# Altium PCB STM32WL.PcbDoc (part 2 of 2)
Units mm, origin at the board's own origin, x right, y up, seen from the top; angles counter-clockwise.
Board outline 40.25 x 54.25 mm, 4 copper layers (Top Layer, Int1 (GND), Int2 (PWR), Bottom Layer), stack 1.57 mm thick; 116 components, 68 nets, 370 pads, 250 vias.
Unrouted connection lines stored in the file: 2.
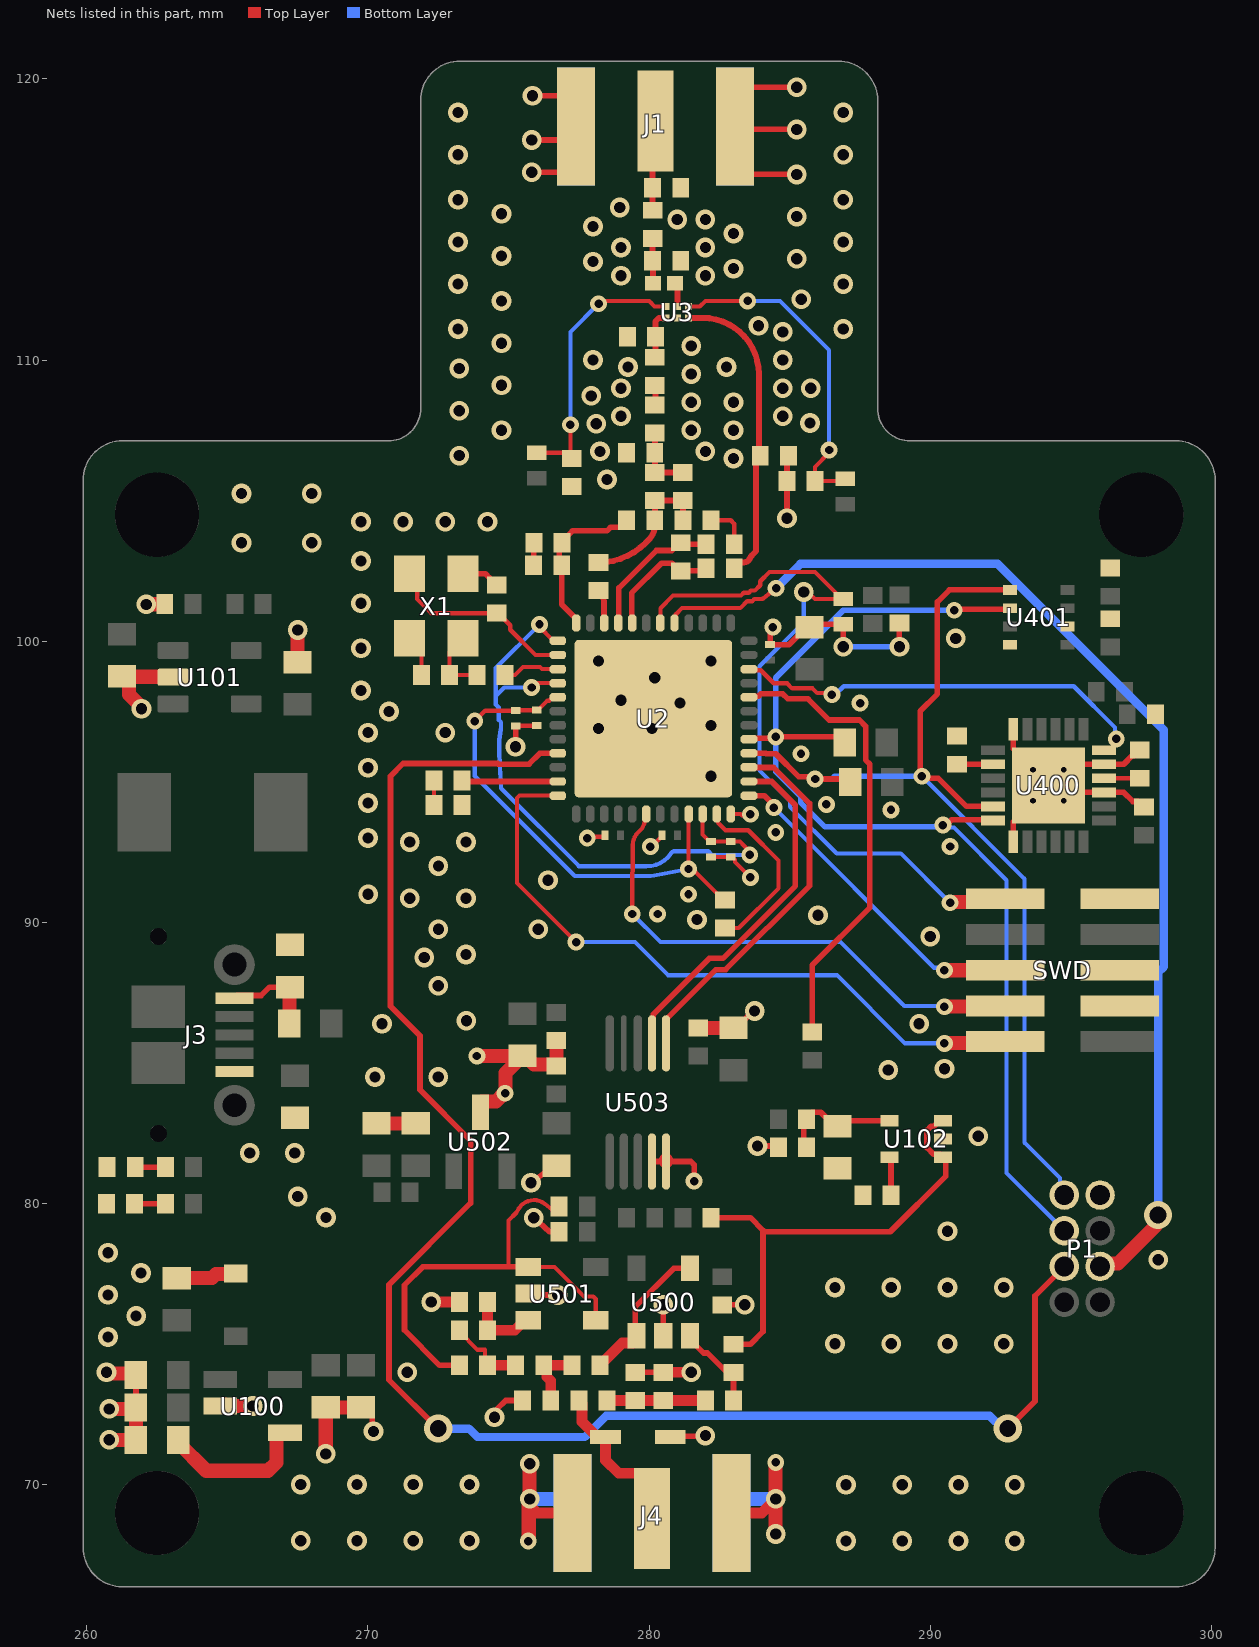
[diagram p4: the nets of this part, all layers, seen from the top]

## Via types
v1: diameter 0.7, hole 0.4, Top Layer to Bottom Layer, 184 vias
v2: diameter 0.6, hole 0.3, Top Layer to Bottom Layer, 50 vias
v3: diameter 1, hole 0.6, Top Layer to Bottom Layer, 12 vias
v4: diameter 0.5, hole 0.2, Top Layer to Bottom Layer, 4 vias

## Nets (pads, with @x,y where several pads share a name; then routed paths per layer and width w, separated by ;. In a path a pad name is that pad's centre, name@x,y a point inside that pad or via, vN(x,y) a via of type N, cw(c..) or ccw(c..) an arc to the next point about the centre after c; other vN are vias at no path point) (continued)
GND: C1.1 C2.1 C5.1 C7.1 C8.1 C10.1 C11.1 C12.1 C13.1 C14.1 C17.1 C18.1 C19.2 C20.2 C21.1 C22.1 C24.1 C25.1 C26.1 C27.1 C29.1 C31.1 C100.1 C101.1 C102.1 C103.1 C104.1 C105.1 C106.1 C107.1 C108.1 C109.1 C110.2 C200.1 C205.1 C400.1 C401.1 C402.1 C403.1 C404.1 C405.1 C500.1 C503.1 C504.1 C508.1 C509.1 C510.1 C511.1 C512.1 C513.1 C514.1 C515.1 D500.1 J1.2 J3.5 J4.2 P1.2 R101.1 R103.1 R104.1 R114.1 R200.1 R204.1 R501.1 SWD.3 SWD.5 SWD.9 U2.48 U2.49 U3.2 U100.2 U101.2 U102.2 U400.1 U400.9 U400.11 U400.18 U400.25 U401.1 U401.7 U500.2 U501.2 U502.3 U503.4 U503.5 X1.2 X1.4 | length 98.3
  Top Layer w0.15: X1.2@271.479,100.098 271.904,99.673 C11.1@271.904,98.798 ; C27.1@275.258,96.981 275.27,96.994 275.987,96.994 C26.1@276,97.006 ; v2(277.8,93) 277.85,93.05 278.375,93.05 C14.1@278.425,93.1 C14.1@278.4,93.125 ; v2(280.044,92.695) 280.095,92.695 280.45,93.05 C21.1@280.45,93.1 ; C25.1@282.2,92.325 C24.1@282.9,92.325 282.95,92.325 283.05,92.225 283.05,92.15 v2(283.6,91.6) ; C5.1@282.2,104.3 282.9,104.3 283.025,104.175 C18.1@283.025,103.45 ; U2.48@282.902,93.851 283.249,93.851 283.3,93.8
  Top Layer w0.2: C103.1@261.7,72.7 C103.1@261.75,72.75 C102.1@261.75,73.9 ; U100.2@264.75,72.8 U100.2@264.95,73 ; C105.1@269.75,72.75 269.85,72.75 270.15,72.45 270.15,71.95 v1(270.2,71.9) ; X1.4@273.379,102.398 274.179,102.398 274.329,102.248 274.329,102.198 274.529,101.998 C10.1@274.579,101.998 ; v1(274.5,72.4) 274.596,72.496 274.596,72.696 274.9,73 C503.1@275.5,73 ; v1(275.245,96.25) 275.251,96.256 275.251,96.975 C27.1@275.258,96.981 ; U501.2@275.7,76.8 275.75,76.75 v1(276.75,76.75) ; v1(275.8,80.746) 276.6,81.35 C510.1@276.7,81.35 ; v1(275.825,116.675) 276.825,116.675 277.4,117.25 J1.2@277.4,118.3 ; v1(275.825,117.825) 276.925,117.825 J1.2@277.4,118.3 ; v1(275.85,119.4) 276.825,119.4 277.4,118.825 J1.2@277.4,118.3 ; C2.1@275.891,102.7 275.9,102.709 C1.1@275.9,103.5 ; v1(275.9,79.5) 276.461,79 C20.2@276.8,79 ; R501.1@279.5,74 C500.1@280.5,74 ; U503.4@280.1,81.5 U503.5@280.554,81.5 ; U500.2@280.5,75.3 v1(280.5,76.4) ; U503.5@280.6,81.5 281.483,81.5 281.6,81.383 v2(281.6,80.8) ; D500.1@280.75,71.7 280.775,71.725 281.975,71.725 v1(282,71.75) ; C515.1@281.75,86.25 C515.1@281.8,86.3 ; C19.2@282.6,76.4 v1(283.4,76.4) ; C514.1@283,86.25 283.1,86.25 283.7,86.85 v1(283.75,86.85) ; v1(283.85,82.05) 284.55,82.05 R114.1@284.6,82 ; v2@284.401,100.4 284.3,100.299 C22.1@284.3,99.875 284.975,99.875 285.6,100.5 C205.1@285.7,100.5 285.8,100.6 R204.1@286.902,100.6 286.9,100.598 v1(286.9,99.8) ; v1(284.9,104.375) C31.1@284.9,105.65 ; C31.1@284.9,105.7 284.9,106.55 C12.1@284.95,106.6 ; v1(285.25,116.6) 283.625,116.6 283.05,117.175 J1.2@283.05,118.3 ; v1(285.25,118.2) 283.15,118.2 J1.2@283.05,118.3 ; v1(285.25,119.7) 283.625,119.7 283.05,119.125 J1.2@283.05,118.3 ; C110.2@287.6,80.25 C110.2@287.6,80.3 ; v1(288.9,99.8) C200.1@288.9,100.65 ; U400.1@292.95,92.875 292.95,93.575 294.2,94.825 U400.25@294.2,94.875 294.2,94.925 292.95,96.175 U400.18@292.95,96.875 ; v4(294.75,94.325) 295.05,94.625 U400.9@296.175,94.625 296.876,94.625 297.201,94.3 297.4,94.3 C402.1@297.6,94.1 ; v4(294.75,95.425) 294.95,95.625 U400.11@296.175,95.625 296.876,95.625 297.176,95.925 297.25,95.925 C401.1@297.45,96.125
  Top Layer w0.381: v1@272.5,76.5 C504.1@273.25,76.5 ; v1@275.8,69.223 276.024,69 J4.2@277.275,69 ; C500.1@280.5,74 v1(281.5,74) ; J4.2@282.925,69 284,69 v1(284.5,69.5)
  Top Layer w0.5: v1(260.7,74) 260.738,73.962 261.688,73.962 C102.1@261.75,73.9 ; v1(260.8,71.6) C106.1@261.75,71.6 261.75,72.65 261.7,72.7 v1(260.8,72.7) ; C107.1@261.25,98.75 C107.1@261.35,98.75 ; v1(261.95,97.6) 261.95,97.654 261.5,98.104 261.5,98.6 C107.1@261.35,98.75 ; v1(262.115,101.309) 262.121,101.315 262.765,101.315 R103.1@262.772,101.322 ; U101.2@263.072,98.722 263.058,98.736 261.364,98.736 C107.1@261.35,98.75 ; U100.2@264.75,72.8 v1(265.9,72.8) ; C108.1@267.5,99.25 v1(267.5,100.4) ; v1(268.5,71.1) C104.1@268.5,72.75 C105.1@269.75,72.75 ; C508.1@270.3,82.85 C509.1@271.7,82.85 ; v2(273.875,85.25) C512.1@275.25,85.25 ; U502.3@273.969,83.219 U502.3@274.05,83.138 ; U502.3@274,83.25 274,83.575 274.05,83.625 274.548,83.625 274.848,83.925 v2(274.875,83.925) 274.894,83.944 274.894,84.644 C512.1@275.25,85 ; C512.1@275.5,85.25 275.6,85.25 275.9,84.95 276.65,84.95 C511.1@276.7,84.9 C513.1@276.7,85.8 ; v2(275.7,68) 275.719,68.019 275.719,69.469 v1(275.75,69.5) v1(275.75,70.75) ; U503.5@280.6,81.5 U503.5@280.6,81.546 ; C515.1@281.75,86.25 C514.1@283,86.25 ; v1(284.5,68.25) v1(284.5,69.5) v2(284.5,70.8)
  Bottom Layer w0.2: v1(286.9,99.8) v1(288.9,99.8)
  Bottom Layer w0.5: v1(275.75,69.5) 276.85,69.5 277.275,69.075 J4.2@277.275,69 ; J4.2@282.925,69 282.925,69.075 283.35,69.5 v1(284.5,69.5)
  other v1: 287,68 289,68 291,68 293,68 267.609,68.015 269.609,68.015 271.609,68.015 273.609,68.015 267.609,70.015 269.609,70.015 271.609,70.015 273.609,70.015 287,70 289,70 291,70 293,70 271.4,74 286.609,75.015 288.609,75.015 290.609,75.015 292.609,75.015 260.755,75.254 261.755,76.004 272.25,76.5 260.755,76.754 286.609,77.015 288.609,77.015 290.609,77.015 292.609,77.015 261.931,77.532 298.1,78 260.755,78.254 290.609,79.015 268.505,79.504 267.505,80.254 265.8,81.8 267.4,81.8 291.7,82.4 270.25,84.5 272.5,84.5 288.5,84.75 290.5,84.8 270.5,86.4 289.6,86.4 273.5,86.5 272.5,87.75 272,88.75 273.485,88.859 290,89.5 272.505,89.754 276.058,89.758 281.7,90.1 286.005,90.254 271.485,90.859 273.485,90.859 270.005,91.004 276.4,91.5 272.505,92.004 271.485,92.859 273.485,92.859 270,93 270,94.25 282.2,95.2 270,95.5 270,96.75 272.75,96.75 278.2,96.9 280.1,96.9 282.2,97 270.75,97.5 281.1,97.8 279,97.9 269.75,98.25 280.2,98.7 278.2,99.3 282.2,99.3 269.75,99.75 290.9,100.1 269.75,101.35 269.75,102.85 265.5,103.5 268,103.5 269.75,104.25 271.25,104.25 272.75,104.25 274.25,104.25 265.5,105.25 268,105.25 278.5,105.75 283,106.5 273.25,106.6 278.25,106.75 282,106.75 274.75,107.5 281.5,107.5 283,107.5 278.119,107.735 285.721,107.763 279,108 284.75,108 273.25,108.2 281.5,108.5 283,108.5 277.94,108.724 279,109 284.75,109 285.75,109 274.75,109.1 281.5,109.5 273.25,109.7 279.25,109.75 282.75,109.75 278,110 284.75,110 281.5,110.5 274.75,110.6 284.75,111 273.2,111.1 286.9,111.1 283.886,111.216 274.75,112.1 285.407,112.157 273.2,112.7 286.9,112.7 279,113 282,113 283,113.25 278,113.5 285.25,113.6 274.75,113.7 279,114 282,114 273.2,114.2 286.9,114.2 283,114.5 278,114.75 281,115 282,115 285.25,115.1 274.75,115.2 278.95,115.425 273.2,115.7 286.9,115.7 273.2,117.3 286.9,117.3 273.2,118.8 286.9,118.8
  other v2: 280.3,90.3 281.4,91 290.7,92.7 284.5,93.2 283.602,93.846 288.6,94 286.3,94.2 285.4,96 287.5,97.8 284.401,100.5
  other v4: 293.65,94.325 293.65,95.425
IMU_CPOUT: C403.2 U400.20 | length 1.3
  Top Layer w0.2: C403.2@290.95,95.625 U400.20@292.225,95.625
IMU_INT: U2.10 U400.12 | length 15.3
  Top Layer w0.15: U2.10@283.548,99.011 283.592,98.967 283.969,98.967 284.432,98.504 284.907,98.504 285.086,98.325 285.805,98.325 285.975,98.155 286.445,98.155 v2(286.5,98.1) ; U400.12@296.175,96.125 296.425,96.125 296.525,96.225 296.525,96.442 v2(296.611,96.528)
  Bottom Layer w0.15: v2(286.5,98.1) 286.622,98.1 286.922,98.4 295.1,98.4 296.57,96.93 296.57,96.568 v2(296.611,96.528)
IMU_REGOUT: C401.2 U400.10 | length 1.3
  Top Layer w0.15: U400.10@296.175,95.125 C401.2@297.45,95.125
IN: D500.2 J4.1 R500.1 | length 5.9
  Top Layer w0.381: R500.1@277.5,73 277.609,72.891 277.609,72.24 278.15,71.7 D500.2@278.45,71.7 278.45,70.878 278.919,70.41 279.656,70.41 280.1,69.965 J4.1@280.1,68.8
IN_AA_Buf_IN: C504.2 R505.1 U501.3 | length 2.6
  Top Layer w0.381: C504.2@274.25,76.5 R505.1@274.25,75.5 275.225,75.5 275.575,75.85 U501.3@275.7,75.85
IN_AA_Buf_OUT: C505.1 R506.2 U501.1 U501.4 | length 16.6
  Top Layer w0.15: 275,77.75 275,79.4 275.275,79.675 275.366,79.824 cw(c275.9,79.5) 276.288,79.99 276.554,79.779 276.679,79.779 R506.2@276.8,79.9 ; U501.1@275.7,77.75 276.634,77.75 277.684,76.7 278.012,76.7 278.1,76.612 U501.4@278.1,75.85
  Top Layer w0.2: C505.1@273.25,74.25 272.55,74.25 271.3,75.5 271.3,77.1 271.95,77.75 275,77.75 U501.1@275.7,77.75
  Top Layer w0.381: U501.4@277.84,75.987 277.84,75.985 277.975,75.85 U501.4@278.1,75.85
IN_Buf: C501.1 R502.1 U500.3 | length 3
  Top Layer w0.2: U500.3@281.45,75.3 281.45,75.175 281.935,74.69 282.071,74.69 283,73.761 C501.1@283,73
IN_RF: C500.2 C501.2 R500.2 R501.2 | length 3.5
  Top Layer w0.381: R500.2@278.5,73 R501.2@279.5,73 C501.2@282,73
IP_Buf_Out: R503.2 U500.1 U500.4 | length 5.4
  Top Layer w0.2: U500.1@279.55,75.3 279.5,75.35 279.5,76.319 280.881,77.7 U500.4@281.45,77.7
  Top Layer w0.381: R503.2@278.25,74.25 278.25,74.3 278.359,74.41 278.41,74.41 279.04,75.04 279.415,75.04 279.55,75.175 U500.1@279.55,75.3
LDO_BYPASS: C106.2 U100.4 | length 5.5
  Top Layer w0.5: C106.2@263.25,71.6 263.25,71.5 264.25,70.5 266.444,70.5 266.744,70.8 266.744,71.8 266.794,71.85 U100.4@267.05,71.85
LED_BUCK: D101.K R104.2 | length 1.1
  Top Layer w0.2: R104.2@261.726,81.3 D101.K@262.8,81.3
LED_LDO: D100.K R101.2 | length 1.1
  Top Layer w0.2: R101.2@261.7,80 D100.K@262.8,80
MCU_LED_A: D1.A U2.35 | length 3.4
  Top Layer w0.214: D1.A@273.35,95.05 273.389,95.011 U2.35@276.752,95.011
MCU_LED_K: D1.K R200.2 | length 0.9
  Top Layer w0.15: R200.2@272.35,94.175 D1.K@272.35,95.05
MCU_PA: C1.2 C2.2 L1.2 U2.24 | length 5.8
  Top Layer w0.2: U2.24@277.402,100.649 277.402,100.799 276.891,101.309 C2.2@276.891,102.7 276.8,102.791 276.8,103.45 276.85,103.5 277.275,103.925 278.5,103.925 278.625,104.05 279,104.05 279.2,104.25 L1.2@279.2,104.3
MCU_RF_OUT: L2.1 U2.22 | length 1.2
  Top Layer w0.214: L2.1@278.2,101.8 cw(c277.713,101.313) 278.402,101.313 U2.22@278.402,100.649
NetC3_1: C3.1 C5.2 L1.1 L2.2 L3.1 | length 5.2
  Top Layer w0.214: L2.2@278.2,102.8 ccw(c278.2,105.154) 279.864,103.489 280,103.625 ccw(c279.517,104.108) 280.2,104.108 L1.1@280.2,104.3 L3.1@280.2,105 C3.1@281.2,105 C5.2@281.2,104.3
NetC3_2: C3.2 C4.1 C7.2 L3.2 | length 2.4
  Top Layer w0.214: C4.1@280.2,107.4 C7.2@280.2,106.7 L3.2@280.2,106 C3.2@281.2,106
NetC4_2: C4.2 L5.1 | length 0.7
  Top Layer w0.214: C4.2@280.2,108.4 280.225,108.425 280.225,109.075 L5.1@280.2,109.1
NetC6_1: C6.1 C17.2 L4.2 | length 1.6
  Top Layer w0.214: L4.2@280.125,114.325 C17.2@280.125,113.525 280.13,113.52 280.13,112.73 C6.1@280.135,112.725
NetC6_2: C6.2 U3.5 | length 0.9
  Top Layer w0.214: C6.2@280.915,112.725 281,112.64 U3.5@281,111.9
NetC8_2: C8.2 L5.2 U3.1 | length 1.7
  Top Layer w0.214: L5.2@280.2,110.1 280.225,110.1 C8.2@280.225,110.825 280.225,111.375 280.35,111.5 U3.1@280.6,111.5
NetC9_2: C9.2 C12.2 U3.3 | length 11
  Top Layer w0.214: U3.3@281.4,111.5 281.9,111.5 cw(c281.9,109.5) 283.9,109.5 283.9,106.6 ccw(c284.141,106.359) 283.8,106.359 283.8,103.2 283.657,103.056 ccw(c283.808,102.905) 283.61,102.986 cw(c283.325,103.1) 283.325,102.793 283.218,102.793 C9.2@283.025,102.6
NetC10_2: C10.2 U2.26 X1.1 | length 7
  Top Layer w0.15: X1.1@271.479,102.398 271.75,102.126 271.75,101.5 272.252,100.998 C10.2@274.524,100.998 ; C10.2@274.579,100.998 C10.2@274.524,100.998 ; U2.26@276.752,99.511 275.956,99.511 275.061,100.406 275.061,100.566 274.629,100.998 C10.2@274.524,100.998
NetC11_2: C11.2 R1.1 X1.3 | length 2.5
  Top Layer w0.15: X1.3@273.379,100.098 272.904,99.623 C11.2@272.904,98.798 R1.1@273.879,98.798
NetC13_2: C13.2 J1.1 L4.1 | length 3.2
  Top Layer w0.214: L4.1@280.125,115.325 C13.2@280.125,116.125 280.125,118.4 J1.1@280.225,118.5
NetC24_2: C24.2 C25.2 U2.25 U2.28 U2.46 | length 23
  Top Layer w0.15: v2(275.822,98.354) 275.822,98.397 275.936,98.511 U2.28@276.752,98.511 ; v2(276.099,100.6) 276.056,100.556 276.602,100.011 U2.25@276.752,100.011 ; U2.46@281.902,93.851 281.902,93.123 282.15,92.875 C24.2@282.9,92.875 283.23,92.875 283.3,92.805 283.3,92.796 283.575,92.521 v2(283.575,92.4)
  Bottom Layer w0.15: v2(275.822,98.354) 274.848,98.354 274.545,98.05 ; v2(276.099,100.6) 274.545,99.045 274.545,98.05 ; v2(283.575,92.4) 282.237,92.4 282.104,92.533 280.888,92.533 280.863,92.524 ccw(c280.914,92.383) 280.789,92.466 cw(c279.929,93.024) 279.892,92 279.885,92 277.5,92 274.726,94.774 274.67,96.012 274.67,96.488 274.725,96.864 274.726,96.886 274.726,97.122 274.65,97.198 274.65,97.647 274.545,97.753 274.545,98.05
NetC26_2: C26.2 C27.2 L7.1 U2.29 U2.45 | length 18.1
  Top Layer w0.15: v2(273.8,97.16) 273.801,97.16 274.172,97.531 C27.2@275.258,97.531 275.27,97.544 275.987,97.544 C26.2@276,97.556 276.05,97.556 276.379,97.886 276.446,97.886 276.571,98.011 U2.29@276.752,98.011 ; v2(281.4,91.9) 281.486,91.814 281.636,91.814 282.65,90.8 L7.1@282.7,90.8 ; v2@281.401,91.901 U2.45@281.402,93.851
  Bottom Layer w0.15: v2(273.8,97.16) 273.8,95.205 277.311,91.694 277.355,91.65 279.929,91.649 ccw(c279.929,93.024) 280.18,91.672 v2(281.4,91.9)
NetC29_2: C29.2 R4.2 U3.6 | length 9.7
  Top Layer w0.15: R4.2@276,106.7 277.05,106.7 C29.2@277.2,106.55 ; v2(277.2,107.7) C29.2@277.2,106.55 ; C29.2@277.25,106.5 C29.2@277.2,106.55 ; v2(278.2,112) 278.3,112 278.4,112.1 280,112.1 280.1,112 280.1,111.988 280.188,111.9 U3.6@280.6,111.9
  Bottom Layer w0.15: v2(277.2,107.7) 277.2,111 v2(278.2,112)
NetC31_2: C31.2 R15.1 U3.4 | length 11.8
  Top Layer w0.15: U3.4@281.4,111.9 281.8,111.9 282,112.1 v2(283.5,112.1) ; v2(286.4,106.8) 286.4,106.7 285.9,106.2 C31.2@285.9,105.7 286.9,105.7 R15.1@286.975,105.775
  Bottom Layer w0.15: v2(283.5,112.1) 284.65,112.1 286.4,110.35 v2(286.4,106.8)
NetC110_1: C110.1 U102.5 | length 1.4
  Top Layer w0.2: U102.5@288.55,81.65 288.6,81.6 C110.1@288.6,80.3
NetC503_2: C503.2 R503.1 R504.2 | length 2.4
  Top Layer w0.381: C503.2@276.5,73 276.5,73.7 276.36,73.841 276.36,74.14 R504.2@276.25,74.25 R503.1@277.25,74.25
NetD103_K: D103.K R100.1 | length 2.2
  Top Layer w0.2: D103.K@265.252,77.563 D103.K@265.3,77.515
  Top Layer w0.5: R100.1@263.2,77.35 264.45,77.35 264.6,77.5 265.189,77.5 D103.K@265.252,77.563
NetL7_2: L7.2 U2.47 | length 6.5
  Top Layer w0.15: U2.47@282.402,93.851 282.446,93.807 282.446,93.543 282.713,93.276 283.524,93.276 284.6,92.2 284.6,91.213 283.187,89.8 L7.2@282.7,89.8
NetLabel74: C505.2 R504.1 R505.2 | length 2.8
  Top Layer w0.15: R505.2@273.25,75.5 273.25,75.45 273.9,74.8 274.162,74.8 274.162,74.338 C505.2@274.25,74.25
  Top Layer w0.381: C505.2@274.25,74.25 R504.1@275.25,74.25
NetR1_2: R1.2 U2.27 | length 2
  Top Layer w0.15: R1.2@274.879,98.798 275.231,98.798 275.512,99.079 276.122,99.079 276.19,99.011 U2.27@276.752,99.011
NRST: R204.2 SWD.10 U2.18 | length 27.4
  Top Layer w0.15: U2.18@280.402,100.649 280.402,101.174 280.853,101.625 283.263,101.625 283.363,101.725 283.542,101.725 283.616,101.799 283.758,101.799 283.95,101.991 283.95,102.133 284.277,102.46 285.895,102.46 R204.2@286.855,101.5 ; v1(285.5,101.75) 285.649,101.75 285.899,101.5 R204.2@286.855,101.5 ; R204.2@286.902,101.5 R204.2@286.855,101.5
  Top Layer w0.5: v2(290.7,90.7) 290.727,90.7 290.747,90.72 291.52,90.72 291.64,90.84 SWD.10@292.665,90.84
  Bottom Layer w0.15: v1(285.5,101.75) 285.5,100.685 283.925,99.11 283.925,95.408 285.01,94.323 285.01,94.111 286.671,92.45 288.95,92.45 v2(290.7,90.7)
RFI_RX_N: C18.2 L6.1 U2.21 | length 5
  Top Layer w0.2: U2.21@278.902,100.649 278.925,100.672 278.925,101.897 280.255,103.227 280.802,103.227 281.075,103.5 L6.1@281.125,103.5 281.175,103.45 C18.2@282.025,103.45
RFI_RX_P: C9.1 L6.2 U2.20 | length 4.3
  Top Layer w0.2: U2.20@279.402,100.649 279.379,100.672 279.379,101.709 280.443,102.773 280.802,102.773 281.075,102.5 L6.2@281.125,102.5 281.925,102.5 C9.1@282.025,102.6
SEN_SCL: P1.1 R2.1 U2.4 U400.23 U401.4 | length 37.1
  Top Layer w0.2: U2.4@283.548,96.011 284.148,96.011 284.159,96 284.5,96 285.323,95.177 285.823,95.177 v2(285.9,95.1) 287.05,95.1 R2.1@287.15,95 ; U400.23@292.225,94.125 291.283,94.125 290.285,95.123 289.777,95.123 v2(289.7,95.2) 289.637,95.263 289.637,97.51 290.25,98.123 290.25,101.399 290.676,101.825 U401.4@292.825,101.825
  Bottom Layer w0.15: v2(289.7,95.2) 293.35,91.55 293.35,82.167 294.608,80.909 294.608,80.462 P1.1@294.765,80.305
  Bottom Layer w0.2: v2(285.9,95.1) 286.5,95.1 286.6,95.2 v2(289.7,95.2)
SEN_SDA: P1.3 R3.1 U2.5 U400.24 U401.3 | length 41.4
  Top Layer w0.2: U2.5@283.548,96.511 283.582,96.544 284.444,96.544 v2(284.5,96.6) 286.75,96.6 R3.1@286.95,96.4 ; v2(290.447,93.459) 290.524,93.535 290.635,93.535 290.75,93.65 292.2,93.65 U400.24@292.225,93.625 ; v2(290.85,101.1) 290.887,101.137 292.787,101.137 U401.3@292.825,101.175
  Bottom Layer w0.15: v2(290.447,93.459) 290.533,93.373 290.84,93.373 292.712,91.501 292.712,81.088 P1.3@294.765,79.035
  Bottom Layer w0.2: v2(290.447,93.459) 290.388,93.4 286.251,93.4 285.385,94.266 285.385,94.479 284.5,95.364 v2(284.5,96.6) 284.5,98.7 286.9,101.1 v2(290.85,101.1)
SPI1_MISO: U2.2 U503.7 | length 12.9
  Top Layer w0.2: U503.7@280.1,85.7 280.1,86.577 280.15,86.627 280.15,86.736 282.135,88.721 282.625,88.721 285.2,91.296 285.2,94.169 284.358,95.011 U2.2@283.548,95.011
SPI1_NCS: U2.3 U503.6 | length 13.5
  Top Layer w0.2: U503.6@280.6,85.7 280.633,85.733 280.633,86.583 282.371,88.321 282.72,88.321 285.7,91.301 285.7,94.234 284.424,95.511 U2.3@283.548,95.511
SPI1_SCK: R509.1 U2.8 | length 16.5
  Top Layer w0.2: U2.8@283.548,98.011 283.582,98.044 283.881,98.044 283.966,98.129 284.752,98.129 284.931,97.95 285.65,97.95 286.4,97.2 287.474,97.2 287.7,96.974 287.7,95.774 287.85,95.624 287.85,90.531 285.8,88.481 R509.1@285.8,86.1
SWCLK: SWD.4 U2.42 | length 18.3
  Top Layer w0.15: v2(279.4,90.3) 279.4,90.825 279.42,92.763 cw(c280.045,92.755) 279.602,93.196 279.743,93.338 279.827,93.512 279.858,93.626 U2.42@279.902,93.851
  Top Layer w0.5: v2(290.5,87) 290.515,87.015 291.52,87.015 291.535,87.03 SWD.4@292.665,87.03
  Bottom Layer w0.15: v2(279.4,90.3) 280.4,89.3 286.8,89.3 289,87.1 289.075,87.025 290.475,87.025 v2(290.5,87)
SWDIO: SWD.2 U2.36 | length 24.3
  Top Layer w0.15: U2.36@276.752,94.511 275.388,94.511 275.3,94.423 275.3,91.4 v2(277.4,89.3)
  Top Layer w0.5: v2(290.5,85.7) 290.519,85.719 292.624,85.719 SWD.2@292.665,85.76
  Bottom Layer w0.15: v2(277.4,89.3) 279.5,89.3 280.675,88.125 286.675,88.125 289.1,85.7 v2(290.5,85.7)
SWO: SWD.6 U2.1 | length 11.7
  Top Layer w0.2: U2.1@283.548,94.504 284.096,94.504 284.435,94.165 v2(284.435,94.085)
  Top Layer w0.5: v2(290.5,88.3) SWD.6@292.665,88.3
  Bottom Layer w0.15: v2(284.435,94.085) 290.134,88.386 290.414,88.386 v2(290.5,88.3)
UART_RX: P1.5 U2.33 | length 60.1
  Top Layer w0.2: v3(272.5,72) 272.481,72 270.75,73.731 270.75,77.116 273.65,80.016 273.65,82.251 271.85,84.051 271.85,85.969 270.8,87.019 270.8,95.2 271.25,95.65 274.62,95.65 274.639,95.631 275.73,95.631 276.109,96.011 U2.33@276.752,96.011 ; v3(292.75,72) 293.721,72.971 293.721,76.721 P1.5@294.765,77.765
  Bottom Layer w0.3: v3(272.5,72) 273.59,72 273.89,71.7 277.715,71.7 278.465,72.45 292.111,72.45 292.561,72 v3(292.75,72)
UART_TX: P1.6 U2.17 | length 41.2
  Top Layer w0.15: U2.17@280.902,100.649 280.946,100.693 280.946,100.957 281.17,101.181 283.243,101.181 283.487,101.425 283.667,101.425 283.74,101.499 283.975,101.499 ccw(c283.974,101.649) 284.067,101.531 v2(284.515,101.885)
  Top Layer w0.5: P1.6@296.035,77.765 296.14,77.87 296.67,77.87 298.004,79.204 298.004,79.504 v3(298.1,79.6)
  Bottom Layer w0.3: v2(284.515,101.885) 285.38,102.75 292.395,102.75 298.3,96.845 298.3,88.417 298.1,88.217 v3(298.1,79.6)
VCOM: R502.2 R507.2 U102.1 U102.3 | length 17
  Top Layer w0.2: R507.2@282.2,79.5 283.6,79.5 284.05,79.05 ; R502.2@283,75 283.6,75 284.05,75.45 284.05,79.05 ; U102.3@290.45,82.95 290.325,82.95 290.125,82.75 290.021,82.75 289.875,82.604 289.875,81.996 290.121,81.75 290.35,81.75 290.55,81.55 290.55,80.976 288.574,79 284.1,79 284.05,79.05
VDC: C100.2 J3.1 L100.1 | length 3.5
  Top Layer w0.2: J3.1@265.25,87.3 265.35,87.4 266.2,87.4 266.5,87.7 C100.2@267.225,87.7
  Top Layer w0.5: L100.1@267.2,86.4 267.213,86.413 267.213,87.688 C100.2@267.225,87.7
VRef: C109.2 R105.1 R114.2 U102.4 | length 4.4
  Top Layer w0.2: R114.2@285.6,82 285.5,82.1 285.5,82.9 R105.1@285.6,83 285.6,83.05 285.8,83.25 286.1,83.25 286.6,82.75 C109.2@286.7,82.75 ; C109.2@286.75,82.75 286.95,82.95 U102.4@288.55,82.95
pads on no net: J3.2 J3.3 J3.4 J3.6 J3.7 J3.8 J3.9 J3.10 J3.11 P1.4 P1.7 SWD.7 SWD.8 U2.7 U2.9 U2.12 U2.13 U2.14 U2.15 U2.16 U2.23 U2.30 U2.31 U2.32 U2.34 U2.38 U2.39 U2.40 U2.43 U400.2 U400.3 U400.4 U400.5 U400.6 U400.7 U400.14 U400.15 U400.16 U400.17 U400.19 U400.21 U400.22 U401.2

## Polygon pours and split planes (outlines as drawn)
GND on Top Layer "GND_L01_P022" (solid, pour order 22): 273.2,120.148 ccw(c273.2,119.545) 272.773,119.971 272.554,119.752 ccw(c273.407,118.898) 272.2,118.898 272.2,107.648 cw(c271.596,107.648) 272.023,107.221 271.804,107.002 cw(c270.95,107.855) 270.95,106.648 261.304,106.648 ccw(c261.304,105.795) 260.7,106.398 260.377,106.075 ccw(c260.804,105.648) 260.2,105.648 260.2,67.752 ccw(c261.054,67.752) 260.45,67.148 260.773,66.825 ccw(c261.2,67.252) 261.2,66.648 298.596,66.648 ccw(c298.596,67.502) 299.2,66.898 299.346,67.045 ccw(c298.493,67.898) 299.7,67.898 299.7,105.191 ccw(c297.993,105.191) 299.2,106.398 ccw(c298.596,105.795) 298.596,106.648 288.7,106.648 cw(c288.7,107.252) 288.273,106.825 287.95,107.148 cw(c288.554,107.752) 287.7,107.752 287.7,119.295 ccw(c286.846,119.295) 287.45,119.898 ccw(c286.846,119.295) 286.846,120.148 286.2,120.148
+3V3 on Top Layer "+3V3_L01_P014" (solid, pour order 14): 265.772,92.322 267.972,92.322 268.272,92.622 268.272,98.022 268.072,98.222 267.072,98.222 266.772,97.922 266.772,96.322 266.672,96.222 265.772,96.222 265.672,96.122 265.672,92.522
VDC on Top Layer "VDC_L01_P015" (solid, pour order 15): 264.4,87.1 264.5,87 266.5,87 266.5,85.9 266.7,85.7 267.7,85.7 267.8,85.8 267.8,87.4 268.1,87.7 268.1,88.7 268,88.8 266.8,88.8 266.7,88.7 266.7,87.6 264.4,87.6
GND on Top Layer "GND_L01_P012" (solid, pour order 12): 280.6,76.9 280.9,76.6 280.9,74.6 281,74.5 281.6,74.5 281.7,74.4 281.9,74.2 281.9,73.7 281.8,73.6 279.2,73.6 279.1,73.6 279,73.7 279,74.3 279.1,74.4 279.9,74.4 280.1,74.6 280.1,76.6 280.4,76.9
BUCK_SW on Top Layer "BUCK_SW_L01_P013" (solid, pour order 13): 263.272,92.322 263.772,92.822 263.772,98.022 263.572,98.222 262.472,98.222 262.272,98.022 262.272,96.922 261.972,96.622 261.072,96.622 260.872,96.422 260.872,92.522 261.072,92.322
GND on Int2 (PWR) "GND_L03_P019" (solid, pour order 19): 273.2,120.148 ccw(c273.2,119.545) 272.773,119.971 272.554,119.752 ccw(c273.407,118.898) 272.2,118.898 272.2,107.648 cw(c271.596,107.648) 272.023,107.221 271.804,107.002 cw(c270.95,107.855) 270.95,106.648 261.304,106.648 ccw(c261.304,105.795) 260.7,106.398 260.377,106.075 ccw(c260.804,105.648) 260.2,105.648 260.2,67.752 ccw(c261.054,67.752) 260.45,67.148 260.773,66.825 ccw(c261.2,67.252) 261.2,66.648 298.596,66.648 ccw(c298.596,67.502) 299.2,66.898 299.346,67.045 ccw(c298.493,67.898) 299.7,67.898 299.7,105.191 ccw(c297.993,105.191) 299.2,106.398 ccw(c298.596,105.795) 298.596,106.648 288.7,106.648 cw(c288.7,107.252) 288.273,106.825 287.95,107.148 cw(c288.554,107.752) 287.7,107.752 287.7,119.295 ccw(c286.846,119.295) 287.45,119.898 ccw(c286.846,119.295) 286.846,120.148 286.2,120.148
GND on Int1 (GND) "GND_L02_P021" (solid, pour order 21): 273.152,120.2 ccw(c273.152,119.596) 272.725,120.023 272.505,119.804 ccw(c273.359,118.95) 272.152,118.95 272.152,107.7 cw(c271.548,107.7) 271.975,107.273 271.755,107.054 cw(c270.902,107.907) 270.902,106.7 261.255,106.7 ccw(c261.255,105.846) 260.652,106.45 260.329,106.127 ccw(c260.755,105.7) 260.152,105.7 260.152,67.804 ccw(c261.005,67.804) 260.402,67.2 260.725,66.877 ccw(c261.152,67.304) 261.152,66.7 298.548,66.7 ccw(c298.548,67.554) 299.152,66.95 299.298,67.096 ccw(c298.445,67.95) 299.652,67.95 299.652,105.243 ccw(c297.945,105.243) 299.152,106.45 ccw(c298.548,105.846) 298.548,106.7 288.652,106.7 cw(c288.652,107.304) 288.225,106.877 287.902,107.2 cw(c288.505,107.804) 287.652,107.804 287.652,119.346 ccw(c286.798,119.346) 287.402,119.95 ccw(c286.798,119.346) 286.798,120.2 286.152,120.2

## Other copper
Top Layer:
  pour cut-out: 278.575,104.765 277.625,104.765 277.625,101.439 277.965,101.1 280.5,103.635 280.5,104.765

## Silkscreen, mask and mechanical layers (free items; w line width, h text height)
Top Overlay:
  lines w0.254: 260.75,78.75 266.48,78.75 ccw(c266.48,80.02) 267.75,80.02 267.75,83.25 cw(c268.25,83.25) 268.25,83.75 291.25,83.75 291.25,75.75 ccw(c292.52,75.75) 292.52,74.48 ; 265,102.5 268.646,102.5 cw(c268.646,101.646) 269.25,102.25 cw(c267.439,100.439) 270,100.439 ; 265.359,70.015 269.005,70.015 ccw(c269.005,70.868) 269.609,70.265 ccw(c267.798,72.075) 270.359,72.075 ; 265.5,78.5 269.146,78.5 cw(c269.146,77.646) 269.75,78.25 cw(c267.939,76.439) 270.5,76.439 ; 265.5,90.25 269.146,90.25 ccw(c269.146,91.104) 269.75,90.5 ccw(c267.939,92.311) 270.5,92.311 ; 268.5,80.75 269,80 ; 269,83.5 269,80 ; 269.5,80.75 269,80 ; 270.5,106.5 270.5,104.561 ccw(c271.25,104.561) 270.72,104.03 ccw(c272,105.311) 272,103.5 274.043,103.5 cw(c274.043,101.793) 275.25,103 cw(c274.646,102.396) 275.5,102.396 275.5,101.854 ccw(c276.354,101.854) 275.75,101.25 ccw(c276.354,101.854) 276.354,101 284.146,101 ccw(c284.146,101.854) 284.75,101.25 ccw(c282.939,103.061) 285.5,103.061 cw(c285.957,103.061) 285.634,103.384 cw(c286.518,102.5) 286.518,103.75 288.396,103.75 289.5,103.75 ccw(c288.896,104.354) 289.75,104.354 289.75,106.25 ; 272.5,86.75 273,87.5 ; 273,84 273,87.5 ; 273.5,86.75 273,87.5 ; 282,80.75 282.5,80 ; 282.5,83.5 282.5,80 ; 283,80.75 282.5,80 ; 286.75,84 286.75,87.5 ; 287.25,86.75 286.75,87.5 ; 292.5,74.5 299.48,74.5 ; 286.75,87.5 286.25,86.75 286.75,87.5
  text "RF TX/RX" at 276.669,107.595 h1 r90
  text "SMPS Reg" at 269.3,92.15 h0.9 r90
  text "Digital" at 280.254,87.837 h1
  text "GND" at 297.65,80.15 h0.5
  text "SCL" at 291.618,80.017 h0.5
  text "Analog" at 284.004,78.587 h1
  text "SDA" at 291.618,78.517 h0.5
  text "U_RX" at 291.65,77.483 h0.5
  text "U_TX" at 297.4,77.233 h0.5
  text "3V3" at 297.65,75.9 h0.5
  text "LoRa Sens" at 285.754,72.504 h1.52
  text "Rev 1.0" at 285.754,71.004 h1
  text "Sensor IN" at 285.754,68.754 h1
  text "LDO Reg" at 265.25,68.25 h1.52
Mechanical 1:
  lines w0.254: 272,119.13 271.855,108.116 cw(c270.739,108.116) 270.739,107 261.27,107 ccw(c261.27,105.73) 260,105.73 260,103 ; 272,119.23 cw(c273.27,119.23) 273.27,120.5 286.73,120.5 cw(c286.73,119.23) 288,119.23 288,108.27 ccw(c289.27,108.27) 289.27,107 298.73,107 cw(c298.73,105.73) 300,105.73 300,104.9 300,67.77 cw(c298.73,67.77) 298.73,66.5 261.27,66.5 cw(c261.27,67.77) 260,67.77 260,103 ; 260,103 ccw(c260,103) 260,103

## Dimensions
300,67.77 to 259.873,103 on Mechanical 8
286.73,120.5 to 298.73,66.5 on Mechanical 8
260,67.77 to 300,67.77 on Mechanical 8
282.925,69 to 300,67.77 on Mechanical 8
277.275,69 to 260,67.77 on Mechanical 8
300,117.5 to 288,119.1 on Mechanical 8
260,116.7 to 272,116.9 on Mechanical 8
300,116.2 to 283.05,118.3 on Mechanical 8

## Text inside footprints (layer, text, board x,y; h text height)
D1: Top 3D Body "+" at 274.733,94.542 h0.5 r180
D100: Top 3D Body "+" at 265.183,79.492 h0.5 r180
D101: Top 3D Body "+" at 265.183,80.792 h0.5 r180
J1: Mechanical 10 "Edge of PCB" at 282.225,121.225 h0.8 r180
J4: Mechanical 10 "Edge of PCB" at 278.1,66.075 h0.8
P1: Top Overlay "2" at 296,82.25 h1.02 r270; Top Overlay "1" at 294,82 h1.02 r270; Top Overlay "8" at 296,75.25 h1.02 r270; Top Overlay "7" at 294,75.25 h1.02 r270